# Altium PCB Copy of PCB1.PcbDoc
Units mm, origin at the board's own origin, x right, y up, seen from the top; angles counter-clockwise.
Board outline 84.33 x 68.58 mm, 2 copper layers (Top Layer, Bottom Layer); 30 components, 27 nets, 160 pads, 5 vias.
Unrouted connection lines stored in the file: 3.
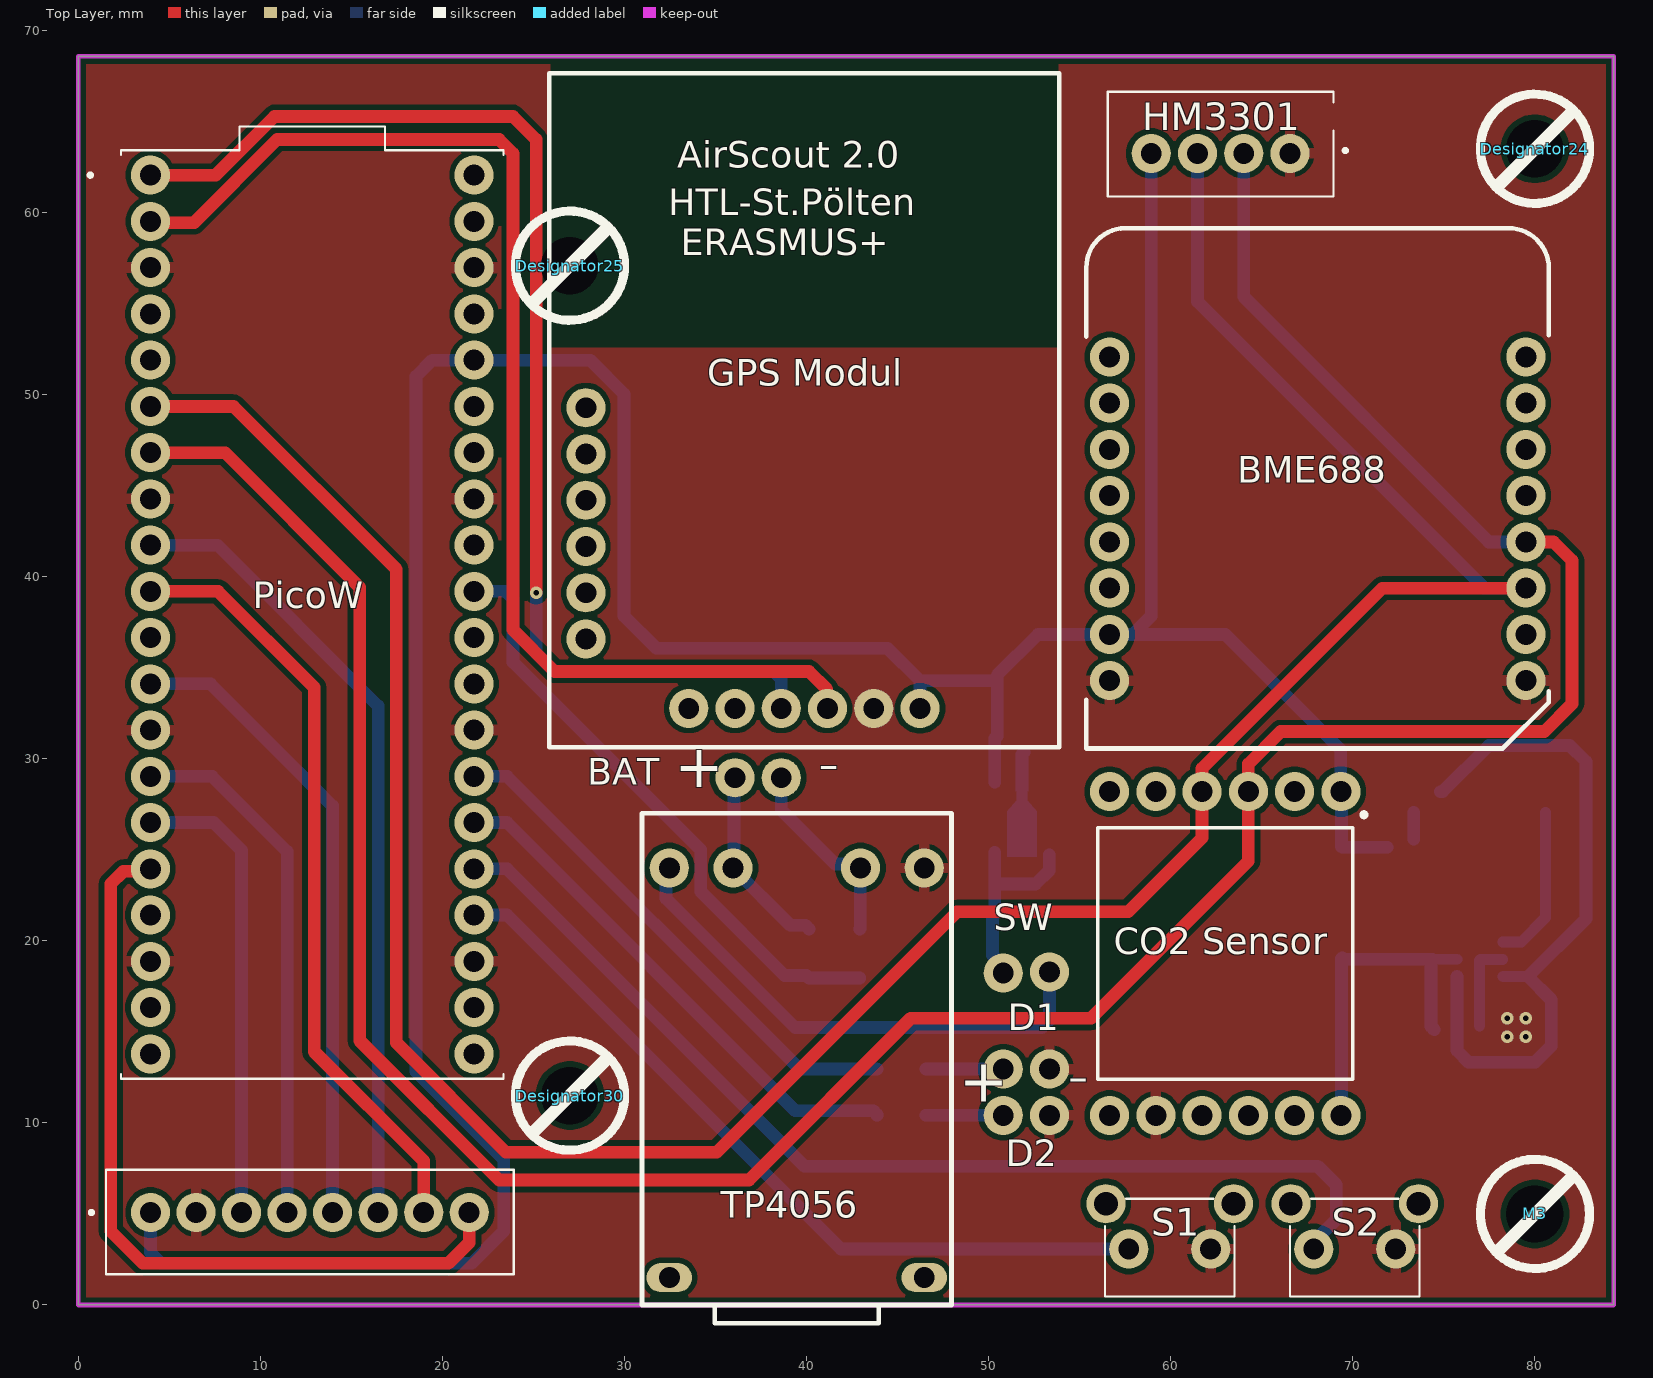
[diagram p0: Top Layer view]
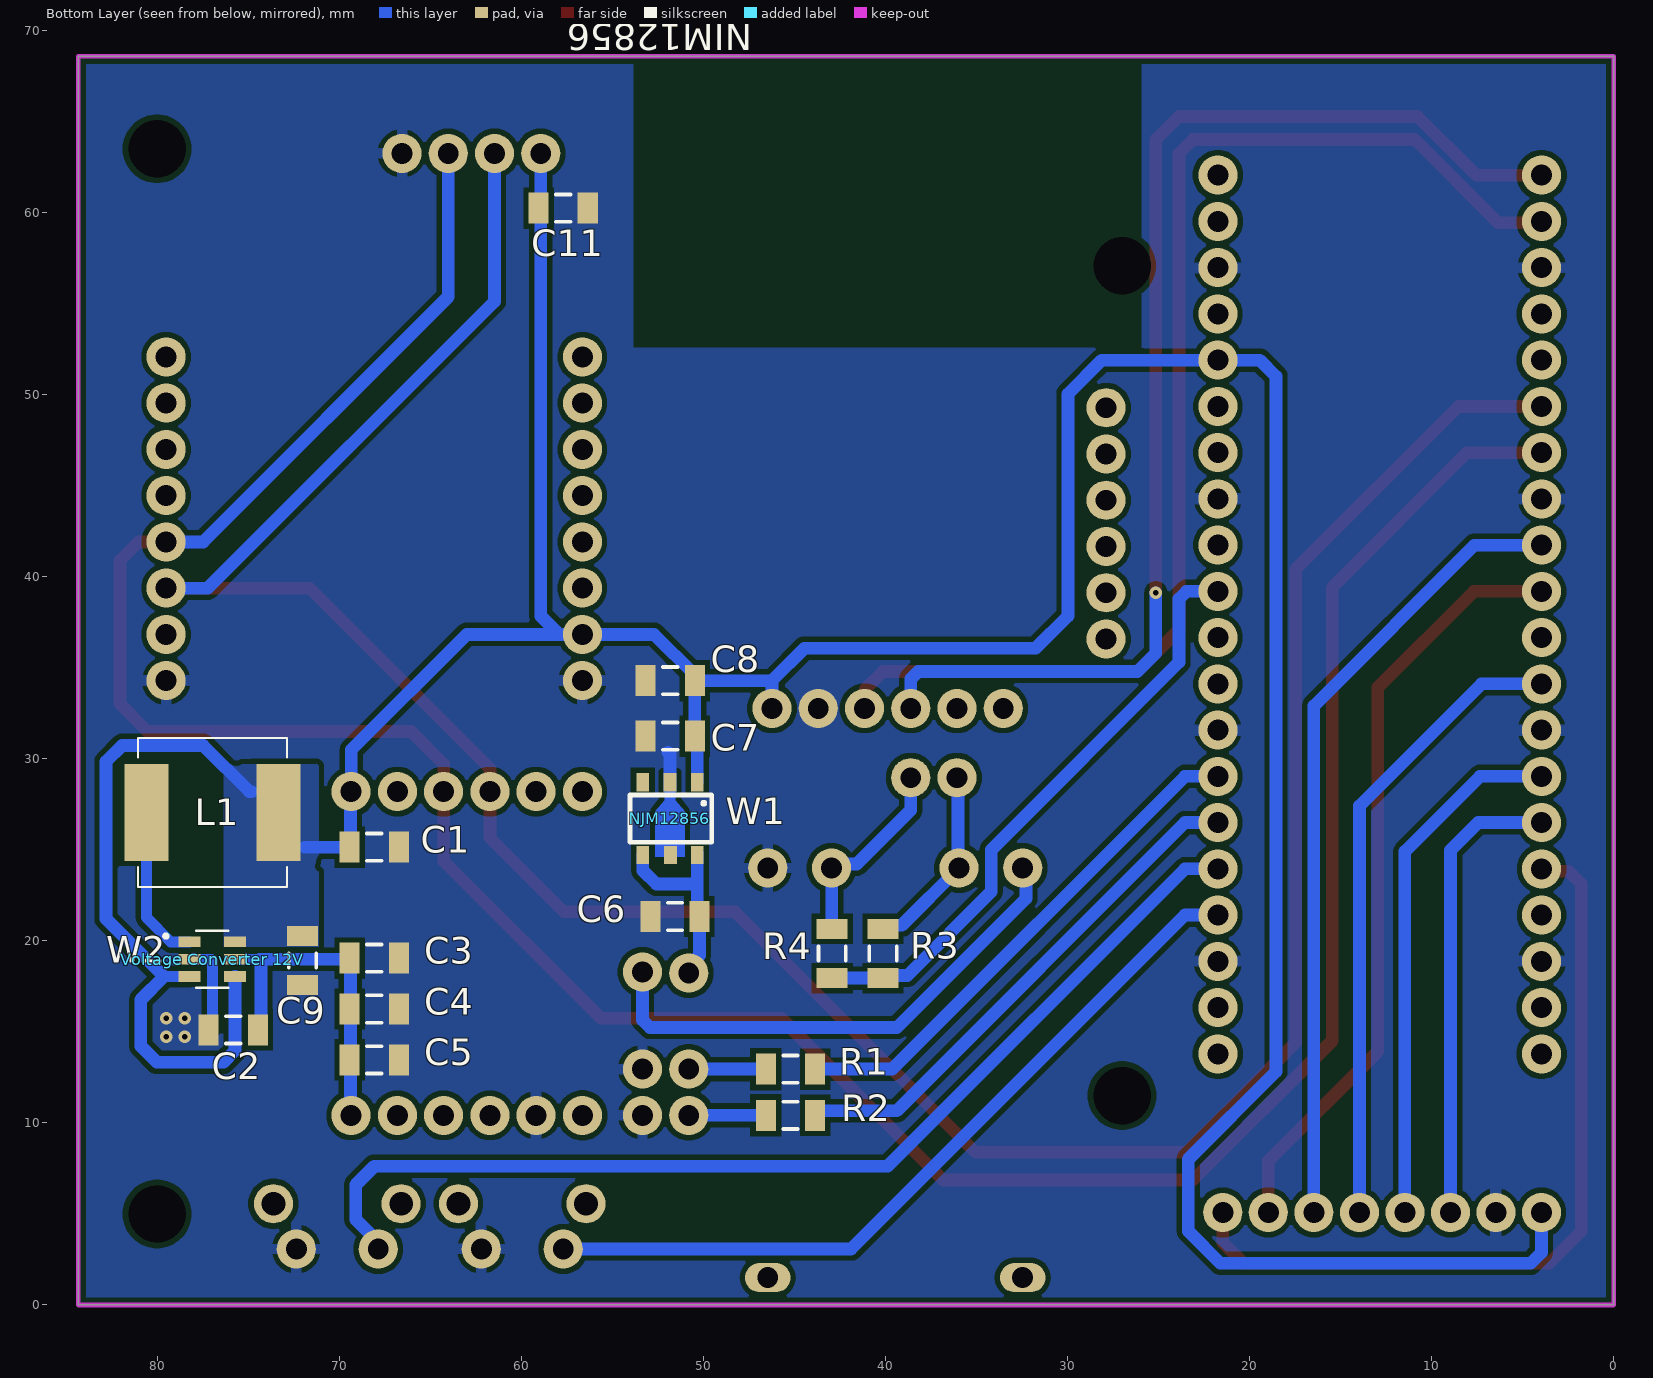
[diagram p1: Bottom Layer view, seen from below]

## Layer stack, top to bottom
Top Solder: solder mask 0.0102, Solder Resist, Dk 3.5
Top Layer: signal copper 0.0356
Dielectric 1: dielectric 0.32, FR-4, Dk 4.8
Bottom Layer: signal copper 0.0356
Bottom Solder: solder mask 0.0102, Solder Resist, Dk 3.5

## Board outline
0,0 0,10.14 0,68.58 84.328,68.58 84.328,0 5.31,0

## Design rules (kind name [scope] priority, off if disabled: settings)
Clearance [All] p1: gap=0.3 ignorepadtopadclearanceinfootprint=FALSE
HoleSize [All] p1: absolutevalues=TRUE maxlimit=3.5 minlimit=0.3 maxpercent=80.000 minpercent=20.000
HoleToHoleClearance [All] p1: gap=0.45 allowstackedmicrovias=TRUE
MinimumAnnularRing [All] p1: minimumring=0.2
PlaneConnect [All] p1: pad.planeconnectstyle=Relief pad.reliefexpansion=0.508 pad.reliefentries=4 pad.reliefconductorwidth=0.6 pad.reliefairgap=0.254 via.planeconnectstyle=Direct via.reliefexpansion=0.508 via.reliefentries=4 via.reliefconductorwidth=0.254 via.reliefairgap=0.254
PolygonConnect PolygonConnect_3 [All vs IsNamedPolygon('GND_L02_P002')] p1: thpad.connectstyle=Relief thpad.reliefconductorwidth=0.6 thpad.reliefentries=4 thpad.polygonreliefangle="90 Angle" thpad.airgapwidth=0.254 smdpad.connectstyle=Direct smdpad.reliefconductorwidth=0.254 smdpad.reliefentries=4 smdpad.polygonreliefangle="90 Angle" smdpad.airgapwidth=0.254 via.connectstyle=Direct via.reliefconductorwidth=0.254 via.reliefentries=4 via.polygonreliefangle="90 Angle" via.airgapwidth=0.254
PolygonConnect PolygonConnect_2 [All vs IsNamedPolygon('GND_L01_P001')] p2: thpad.connectstyle=Relief thpad.reliefconductorwidth=0.6 thpad.reliefentries=4 thpad.polygonreliefangle="90 Angle" thpad.airgapwidth=0.254 smdpad.connectstyle=Direct smdpad.reliefconductorwidth=0.254 smdpad.reliefentries=4 smdpad.polygonreliefangle="90 Angle" smdpad.airgapwidth=0.254 via.connectstyle=Direct via.reliefconductorwidth=0.254 via.reliefentries=4 via.polygonreliefangle="90 Angle" via.airgapwidth=0.254
PolygonConnect PolygonConnect_1 [All vs IsNamedPolygon('3V3_L02_P000')] p3: thpad.connectstyle=Relief thpad.reliefconductorwidth=0.254 thpad.reliefentries=4 thpad.polygonreliefangle="90 Angle" thpad.airgapwidth=0.254 smdpad.connectstyle=Direct smdpad.reliefconductorwidth=0.254 smdpad.reliefentries=4 smdpad.polygonreliefangle="90 Angle" smdpad.airgapwidth=0.254 via.connectstyle=Direct via.reliefconductorwidth=0.254 via.reliefentries=4 via.polygonreliefangle="90 Angle" via.airgapwidth=0.254
PolygonConnect [All vs IsNamedPolygon('3V3_L01_P000')] p4: thpad.connectstyle=Relief thpad.reliefconductorwidth=0.254 thpad.reliefentries=4 thpad.polygonreliefangle="90 Angle" thpad.airgapwidth=0.254 smdpad.connectstyle=Direct smdpad.reliefconductorwidth=0.254 smdpad.reliefentries=4 smdpad.polygonreliefangle="90 Angle" smdpad.airgapwidth=0.254 via.connectstyle=Direct via.reliefconductorwidth=0.254 via.reliefentries=4 via.polygonreliefangle="90 Angle" via.airgapwidth=0.254
PolygonConnect PolygonConnect_10 [All] p5: thpad.connectstyle=Relief thpad.reliefconductorwidth=0.6 thpad.reliefentries=4 thpad.polygonreliefangle="90 Angle" thpad.airgapwidth=0.254 smdpad.connectstyle=Direct smdpad.reliefconductorwidth=0.254 smdpad.reliefentries=4 smdpad.polygonreliefangle="90 Angle" smdpad.airgapwidth=0.254 via.connectstyle=Direct via.reliefconductorwidth=0.254 via.reliefentries=4 via.polygonreliefangle="90 Angle" via.airgapwidth=0.254
RoutingVias [All] p1: holewidth=0.3 width=0.4 viastyle="Through Hole" minholewidth=0.3 minwidth=0.4 maxholewidth=0.3 maxwidth=1
SolderMaskExpansion [All] p1: expansion=0.038 istentingtop=FALSE
Width [All] p1: maxlimit=0.7 minlimit=0.4 preferedwidth=0.7
27 further rules are at their usual default settings.

## Classes and differential pairs
component class Sheet1: BME688 C1 C2 C3 C4 C5 C6 C7 C8 C9 C11 "CO2 Sensor" "GPS Modul" L1 PicoW R1 R2 R3 R4 S1 S2 TLV61046ADBVR

## Components (designator, comment, footprint, x,y, rotation, side; value= is the part's Value field where it differs from the comment)
BME688 "" MIKROE-4893 56.642,34.29 r0 top
C1 "Cap" C1206 68.072,25.146 r0 bottom value=4.7uF
C2 "Cap" C1206 75.819,15.113 r180 bottom value=4.7uF
C3 "Cap" C1206 68.072,19.05 r0 bottom value=47uF
C4 "Cap" C1206 68.072,16.256 r0 bottom value=470pF
C5 "Cap" C1206 68.072,13.462 r0 bottom value=100nF
C6 "Cap" C1206 51.562,21.336 r180 bottom value=4.7uF
C7 "Cap" C1206 51.816,31.242 r180 bottom value=4.7uF
C8 "Cap" C1206 51.816,34.29 r180 bottom value=100nF
C9 "Cap" C1206 72.009,18.923 r90 bottom value=4.7uF
C11 "Cap" C1206 57.698,60.238 r0 bottom value=4.7uF
"CO2 Sensor" "PASCO2V01" IFX-SMD-LG-MLGA-14-1-V_MODUL 69.342,28.194 r270 top
Designator24 "Comment" Schraube-M3 80,63.5 r0 top
Designator25 "Comment" Schraube-M3 27,57.08 r0 top
Designator30 "Comment" Schraube-M3 27,11.5 r0 top
"GPS Modul" "CAM-M8Q Breakout" CAM-M8Q-Breakout 27.878,49.276 r270 top
HM3301 "Comment" JST_B4B-XH-AM_(LF)(SN) 62.738,63.754 r0 top
L1 "Inductor" IHLP3232DZER330M11 76.962,27.051 r0 bottom value=10uH
M3 "Comment" Schraube-M3 80,5 r0 top
NJM12856 "NJM12856" SOT89-5 51.816,26.416 r0 bottom (schematic designator "Spannungsregler 3V3")
PicoW "SC0915" MODULE_SC0915 12.85,37.922 r0 top
R1 "RES" C1206 45.212,12.954 r180 bottom value=220
R2 "RES" C1206 45.212,10.414 r180 bottom value=220
R3 "120k" C1206 40.132,19.304 r90 bottom
R4 "120k" C1206 42.926,19.304 r270 bottom
S1 "2-1825027-0" TE_2-1825027-0 59.944,4.318 r0 top (schematic designator SW1)
S2 "2-1825027-0" TE_2-1825027-0 70.104,4.318 r0 top (schematic designator SW2)
TP4056 "Name" "DEBO1 3.7LI 1.0A Entwicklerboards" 39.46,0 r0 top locked (schematic designator CHB-C-LIT1A)
"Voltage Converter 12V" "TLV61046ADBVR" SOT95P280X145-6N 76.977,18.989 r180 bottom
? "E-Ink" e-paper 3.97,5.08 r90 top

## Footprints (in the part's own frame and the unit in brackets; to place one, negate y for a bottom-side part, rotate by r counter-clockwise, add the part's x,y. Pads: shape width x height; smd on the part's side, far side on the other; paste and mask are expansions set on the pad)
C1206 [mm] "Chip Capacitor, Body 3.2x1.6mm, IPC High Density"
  rect 1.1x1.7 smd: 1(-1.35,0) 2(1.35,0)
  silkscreen extent -0.4,-0.75 0.4,0.75, body extent -1.7,-0.9 1.7,0.9, height 1.3
CAM-M8Q-Breakout [mm] "https://github.com/watterott/CAM-M8Q-Breakout/blob/master/hardware/CAM-M8Q-Breakout_v12.pdf"
  round 2.15 hole 1.15: 1(0,0) 2(2.54,0) 3(5.08,0) 3(16.51,15.81) 4(7.62,0) 5(10.16,0) 6(12.7,0) 7(16.51,5.65) 8(16.51,8.19) 9(16.51,10.73) 10(16.51,13.27) 12(16.51,18.35)
  silkscreen extent -18.37,-2 18.63,26
"DEBO1 3.7LI 1.0A Entwicklerboards" [mm]
  round 2.15 hole 1.15: 1(-7,24) 2(-3.5,24) 3(3.5,24) 4(7,24)
  oval 2.5x1.6 hole 1.15: 5(-7,1.5) 6(7,1.5)
  silkscreen extent -8.5,-1 8.5,27
e-paper [mm]
  round 2.15 hole 1.15: 1(0,0) 2(0,-2.5) 3(0,-5) 4(0,-7.5) 5(0,-10) 6(0,-12.5) 7(0,-15) 8(0,-17.5)
  silkscreen extent -3.4,-19.95 2.35,3.35, body extent -3.4,-19.95 2.35,2.45, height 7
IFX-SMD-LG-MLGA-14-1-V_MODUL [mm] "Module, 2.54 mm Pitch, 14 Pin, 14.00 mm W X 13.80 mm L X 7.68 mm H Body"
  round 2.15 hole 1.15: 3.3(0,0) 12V(17.78,0) GND(17.78,-10.16) INT(17.78,-7.62) PSEL(17.78,-5.08) PWM(17.78,-2.54) PWM_DIS(0,-10.16) RX(0,-2.54) SCL(0,-5.08) SWCLK(17.78,-12.7) SWD(0,-12.7) TX_SDA(0,-7.62)
  silkscreen extent 1.15,-13.35 15.79,1.4, body extent 1.99,-13.35 15.79,0.65, height 18.88
IHLP3232DZER330M11 [mil]
  rect 95x210 smd: 1(-142.48,0) 2(142.48,0)
  silkscreen extent -161,-161 161,161
JST_B4B-XH-AM_(LF)(SN) [mm]
  round 2.15 hole 1.15: 1(3.81,-0.508) 2(1.27,-0.508) 3(-1.27,-0.508) 4(-3.81,-0.508)
  silkscreen extent -6.2,-2.88 6.95,2.88
MIKROE-4893 [mm] "https://www.mikroe.com/environment-3-click#/298-input_voltage-3_3v"
  round 2.15 hole 1.15: 1(0,17.78) 2(0,15.24) 3(0,12.7) 4(0,10.16) 5(0,7.62) 6(0,5.08) 7(0,2.54) 8(0,0) 9(22.86,0) 10(22.86,2.54) 11(22.86,5.08) 12(22.86,7.62) 13(22.86,10.16) 14(22.86,12.7) 15(22.86,15.24) 16(22.86,17.78)
  silkscreen extent -1.28,-3.72 24.13,24.85, body extent -1.4,-3.81 24.38,24.77, height 13.28
MODULE_SC0915 [mm]
  round 2.15 hole 1.15: 1(-8.89,24.13) 2(-8.89,21.59) 3(-8.89,19.05) 4(-8.89,16.51) 5(-8.89,13.97) 6(-8.89,11.43) 7(-8.89,8.89) 8(-8.89,6.35) 9(-8.89,3.81) 10(-8.89,1.27) 11(-8.89,-1.27) 12(-8.89,-3.81) 13(-8.89,-6.35) 14(-8.89,-8.89) 15(-8.89,-11.43) 16(-8.89,-13.97) 17(-8.89,-16.51) 18(-8.89,-19.05) 19(-8.89,-21.59) 20(-8.89,-24.13) 21(8.89,-24.13) 22(8.89,-21.59) 23(8.89,-19.05) 24(8.89,-16.51) 25(8.89,-13.97) 26(8.89,-11.43) 27(8.89,-8.89) 28(8.89,-6.35) 29(8.89,-3.81) 30(8.89,-1.27) 31(8.89,1.27) 32(8.89,3.81) 33(8.89,6.35) 34(8.89,8.89) 35(8.89,11.43) 36(8.89,13.97) 37(8.89,16.51) 38(8.89,19.05) 39(8.89,21.59) 40(8.89,24.13)
  silkscreen extent -12.29,-25.5 10.5,26.8, body extent -10.39,-25.51 10.61,26.79, height 10.47
Schraube-M3 [mm] "Befestigungsschraube für Prints"
  round 0.75 hole 3.15 unplated: 1(0,0)
  silkscreen extent -3,-3 3,3
SOT89-5 [mm]
  rect 0.701x1 smd: 1(-1.486,-2.294) 2(-0.012,1.706) 2(0.014,-2.294) 3(1.513,-2.294) 4(1.515,1.706) 5(-1.486,1.706)
  Top Layer region: -0.786,-0.693 -0.786,1.807 0.814,1.807 0.814,-0.693 0.314,-1.293 0.314,-2.593 0.014,-2.593 -0.286,-2.593 -0.286,-1.293
  Top Layer region: -0.336,-1.794 0.365,-1.794 0.365,-2.794 -0.336,-2.794
  silkscreen extent -2.29,-1.59 2.21,1.01
SOT95P280X145-6N [mm]
  rect 1.21x0.58 smd: 1(-1.255,0.95) 2(-1.255,0) 3(-1.255,-0.95) 4(1.255,-0.95) 5(1.255,0) 6(1.255,0.95)
  silkscreen extent -2.64,-1.56 0.88,1.56
TE_2-1825027-0 [mm]
  round 2.15 hole 1.15: 1(-2.25,-1.245) 2(2.25,-1.245)
  round 2.15 hole 1.3: S1(-3.505,1.245) S2(3.505,1.245)
  silkscreen extent -3.55,-3.86 3.55,1.52

## Part data
BME688: library part "MIKROE-4893 - 3V3"
C1 C2 C3 C4 C5 C6 C7 C8 C9 C11: "Capacitor", LatestRevisionDate=17-Jul-2002, LatestRevisionNote="Re-released for DXP Platform.", PackageDescription="Radial Cap, Thru-Hole; 2 Leads; 0.3 in Pin Spacing", PackageReference=RAD-0.3, Published=8-Jun-2000, Publisher="Altium Limited"
"CO2 Sensor": "XENSIV PAS CO2", Manufacturer="Infineon Technologies", Manufacturer Order Number=PASCO2V01, PackageReference=LG-MLGA-14-1
"GPS Modul": library part DT15-12PA, "DT Series 12 Position Dual Row 4.44 mm Panel Mount Receptacle", Package=None, Availability=Unavailable, MF="TE Connectivity", MP=DT15-12PA, Price=None, SnapEDA_Link=https://www.snapeda.com/parts/DT15-12PA/TE%20Connectivity%20Deutsch%20Connectors/view-part/2279777/?ref=snap
NJM12856: library part TLV61046ADBVR, "Boost Switching Regulator IC Positive Adjustable 3.3V 1 Output SOT-23-6", Package="SOT-23 Texas Instruments", Digi-Key_Part_Number=296-47674-1-ND, Digi-Key_Purchase_URL=https://www.digikey.com/product-detail/en/texas-instruments/TLV61046ADBVR/296-47674-1-ND/8133043?utm_source=snapeda&utm_medium=aggregator&utm_campaign=symbol, MF="Texas Instruments", MP=TLV61046ADBVR, SnapEDA_Link=https://www.snapeda.com/parts/TLV61046ADBVR/Texas%20Instruments/view-part/985721/?ref=snap
PicoW: "RP2040 Raspberry Pi Pico series ARMÂ® CortexÂ®-M0+ MCU 32-Bit Embedded Evaluation Board", Package=None, Availability="In Stock", Check_prices=https://www.snapeda.com/parts/SC0915/Raspberry+Pi/view-part/?ref=eda, MF="Raspberry Pi", MP=SC0915, Price=None, Purchase-URL=https://pricing.snapeda.com/search/part/SC0915/?ref=eda, SnapEDA_Link=https://www.snapeda.com/parts/SC0915/Raspberry+Pi/view-part/?ref=snap
R1 R2: "Widerstand"
R3 R4: library part RES, "Widerstand"
S1 S2: "Switch Tactile OFF _ON_ SPST Round Button PC Pins 0.05A 24VDC 1.57N Thru-Hole Loose Piece", Package=None, Availability=Unavailable, EU_RoHS_Compliance=Compliant, MF="TE Connectivity", MP=2-1825027-0, Price=None, SnapEDA_Link=https://www.snapeda.com/parts/2-1825027-0/TE%20Connectivity%20ALCOSWITCH%20Switches/view-part/236241/?ref=snap, TE_purchase_URL=https://www.te.com/usa-en/product-2-1825027-0.html?te_bu=Cor&te_type=disp&te_campaign=seda_glo_cor-seda-global-disp-prtnr-fy19-seda-model-bom-cta_sma-317_1&elqCampaignId=32493
"Voltage Converter 12V": "Boost Switching Regulator IC Positive Adjustable 3.3V 1 Output SOT-23-6", Package="SOT-23 Texas Instruments", Digi-Key_Part_Number=296-47674-1-ND, Digi-Key_Purchase_URL=https://www.digikey.com/product-detail/en/texas-instruments/TLV61046ADBVR/296-47674-1-ND/8133043?utm_source=snapeda&utm_medium=aggregator&utm_campaign=symbol, MF="Texas Instruments", MP=TLV61046ADBVR, SnapEDA_Link=https://www.snapeda.com/parts/TLV61046ADBVR/Texas%20Instruments/view-part/985721/?ref=snap
?: library part B8B-XH-A(LF)(SN), "Connector Header Through Hole 8 position 0.098 (2.50mm)", Package=None, Check_prices=https://www.snapeda.com/parts/B8B-XH-A(LF)(SN)/JST+Sales+America+Inc./view-part/?ref=eda, MF="JST Sales America Inc.", MP=B8B-XH-A(LF)(SN), SnapEDA_Link=https://www.snapeda.com/parts/B8B-XH-A(LF)(SN)/JST+Sales+America+Inc./view-part/?ref=snap
L1: Code_IEC=1005, Code_JEITA=0402, LatestRevisionDate=29-May-2009, LatestRevisionNote="IPC-7351 Footprint Added.", PackageDescription="Chip Inductor", PackageReference=0402-A, Published=8-Jun-2000, Publisher="Altium Limited"

## Free pads (board coordinates)
  round 2.15 hole 1.15: 14(38.608,28.956) 15(36.068,28.956) 18(53.34,18.288) 19(50.8,18.23) 21(50.8,12.954) 22(53.34,10.414) 23(50.8,10.414) 24(53.34,12.954)

## Via types
v1: diameter 0.7, hole 0.3, Top Layer to Bottom Layer, 5 vias

## Nets (pads, with @x,y where several pads share a name; then routed paths per layer and width w, separated by ;. In a path a pad name is that pad's centre, name@x,y a point inside that pad or via, vN(x,y) a via of type N, cw(c..) or ccw(c..) an arc to the next point about the centre after c; other vN are vias at no path point)
3V3: "CO2 Sensor.3.3" "GPS Modul.12" "Voltage Converter 12V.3" "Voltage Converter 12V.4" "Voltage Converter 12V.6" ?.1 BME688.7 C1.2 C7.2 C8.2 C9.2 C11.2 HM3301.4 L1.1 NJM12856.1 PicoW.34 PicoW.36 | length 222.8
  Bottom Layer w0.6: 78.237,18.034 79.629,18.034
  Bottom Layer w0.7: ?.1@4.185,4.865 ?.1 3.97,2.888 4.572,2.286 21.59,2.286 23.368,4.064 23.368,8.004 18.548,12.824 18.548,51 19.44,51.892 PicoW.36 28.118,51.892 29.972,50.038 29.972,37.846 31.75,36.068 44.45,36.068 46.228,34.29 ; 46.187,32.807 46.228,32.766 46.228,34.29 ; NJM12856.1 50.33,31.106 C7.2 C8.2 ; HM3301.4 58.928,37.846 57.912,36.83 ; 71.882,25.146 C1.2 69.382,25.186 69.382,28.154 69.342,28.194 69.342,30.48 62.992,36.83 57.912,36.83 ; L1.1@73.343,25.59 L1.1 ; 74.803,28.194 74.93,28.194 77.47,30.734 81.915,30.734 82.804,29.845 82.804,21.209 79.629,18.034 80.899,16.764 80.899,14.224 80.01,13.335 76.357,13.335 75.722,13.97 75.722,18.039 ; 46.228,34.29 C8.2 ; C8.2 50.466,34.59 52.706,36.83 BME688.7 57.912,36.83
12V: "CO2 Sensor.12V" "Voltage Converter 12V.5" C2.2 C3.2 C4.2 C5.2 | length 18.9
  Bottom Layer w0.6: 74.356,18.989 75.722,18.989
  Bottom Layer w0.7: 69.342,10.414 69.382,10.454 69.382,19.01 C3.2 69.483,18.989 74.356,18.989 ; 69.85,10.414 69.89,10.454 ; 74.29,18.923 74.29,15.292 C2.2
"ADC Input": PicoW.31 R3.1 R4.2 | length 33.4
  Bottom Layer w0.7: PicoW.31 23.466,39.192 23.876,38.782 23.876,35.306 34.185,24.997 34.185,22.711 38.795,18.101 39.985,18.101 R3.1 R4.2
"Batterie Out": C6.2 NJM12856.4 NJM12856.5 pad.19 | length 11.4
  Bottom Layer w0.7: NJM12856.5 50.33,23.114 ; NJM12856.5 NJM12856.5@50.33,24.859 ; pad.19@50.8,17.918 pad.19 50.8,18.623 50.212,19.211 C6.2 50.33,21.454 50.33,23.114 ; NJM12856.4 53.33,23.866 52.578,23.114 50.33,23.114
GND: "CO2 Sensor.GND" "GPS Modul.3"@43.688,32.766 "Voltage Converter 12V.2" ?.2 BME688.8 BME688.9 C1.1 C2.1 C3.1 C4.1 C5.1 C6.1 C7.1 C8.1 C9.1 C11.1 HM3301.1 NJM12856.2 pad.22 pad.24 PicoW.3 PicoW.8 PicoW.13 PicoW.18 PicoW.23 PicoW.28 PicoW.33 PicoW.38 S1.2 S2.2 TP4056.4 | length 6.7
  Top Layer w0.7: PicoW.23 PicoW.23@21.816,18.796
  Bottom Layer w0.6: C2.1@76.962,15.32 76.962,18.923 77.018,18.979 78.222,18.979 78.232,18.989
  Bottom Layer w0.7: NJM12856.2@51.83,28.71 51.83,30.24 51.943,30.353
  other v1: 78.486,14.732 79.502,14.732 78.486,15.748 79.502,15.748
Net_3: ?.3 PicoW.15 | length 25.5
  Bottom Layer w0.7: PicoW.15 7.441,26.492 8.96,24.973 8.96,5.09 ?.3
Net_4: ?.4 PicoW.14 | length 29.1
  Bottom Layer w0.7: PicoW.14 7.34,29.032 11.47,24.902 ?.4 ?.4@11.46,5.09
Net_5: ?.5 PicoW.12 | length 35.1
  Bottom Layer w0.7: PicoW.12 7.26,34.112 13.96,27.412 13.96,5.09 ?.5
Net_6: ?.6 PicoW.9 | length 44
  Bottom Layer w0.7: PicoW.9 7.64,41.732 16.47,32.902 ?.6 ?.6@16.46,5.09
Net_7: ?.7 PicoW.10 | length 42.5
  Top Layer w0.7: PicoW.10 7.68,39.192 12.96,33.912 12.96,13.912 18.97,7.902 ?.7 ?.7@18.96,5.09
Net_8: ?.8 PicoW.16 | length 44
  Top Layer w0.7: PicoW.16@3.893,23.885 3.829,23.821 2.485,23.821 1.778,23.114 1.778,4.064 3.556,2.286 20.32,2.286 21.47,3.436 ?.8
NetCHB-C-LIT1A_1: pad.18 TP4056.1 | length 28.5
  Bottom Layer w0.7: TP4056.1 32.279,23.819 32.279,22.331 39.37,15.24 52.93,15.24 53.34,15.65 pad.18
NetCHB-C-LIT1A_2: pad.15 R3.2 TP4056.2 | length 10.6
  Bottom Layer w0.7: pad.15 36.014,28.902 36.014,24.054 TP4056.2 39.106,20.854 39.932,20.854 R3.2
NetCHB-C-LIT1A_3: pad.14 R4.1 TP4056.3 | length 10.8
  Bottom Layer w0.7: pad.14 38.608,27.178 41.57,24.216 42.744,24.216 TP4056.3 42.943,23.983 42.943,20.671 R4.1
NetD1_1: pad.21 R1.1 | length 4.2
  Bottom Layer w0.7: R1.1 pad.21
NetD2_1: pad.23 R2.1 | length 4.2
  Bottom Layer w0.7: R2.1 pad.23
NetL1_2: "Voltage Converter 12V.1" L1.2 | length 8.7
  Bottom Layer w0.6: 78.232,19.939 79.248,19.939 80.581,21.272 L1.2
NetPicoW_24: PicoW.24 S1.1 | length 43.6
  Bottom Layer w0.7: PicoW.24 23.546,21.412 41.885,3.073 S1.1
NetPicoW_25: PicoW.25 S2.1 | length 58.6
  Bottom Layer w0.7: PicoW.25 23.546,23.952 39.878,7.62 68.072,7.62 69.088,6.604 69.088,4.699 67.854,3.465 S2.1
NetPicoW_26: PicoW.26 R2.2 | length 28.8
  Bottom Layer w0.7: PicoW.26 23.546,26.492 39.37,10.668 43.662,10.668 43.862,10.468 R2.2
NetPicoW_27: PicoW.27 R1.2 | length 28.8
  Bottom Layer w0.7: PicoW.27 23.546,29.032 39.624,12.954 R1.2
NetSW1_S1: S1.S1 S1.S2
NetSW2_S1: S2.S1 S2.S2
RX: "GPS Modul.10" PicoW.2 | length 68.4
  Top Layer w0.7: PicoW.2 4.036,59.436 6.35,59.436 10.922,64.008 23.114,64.008 23.876,63.246 23.876,37.084 26.162,34.798 40.132,34.798 41.107,33.823 41.107,32.807 41.148,32.766 41.148,33.158
SCL: "CO2 Sensor.SCL" BME688.12 HM3301.2 PicoW.7 | length 163
  Top Layer w0.7: PicoW.7 8.06,46.812 15.46,39.412 15.46,14.512 23.114,6.858 36.83,6.858 45.72,15.748 55.626,15.748 64.262,24.384 64.262,28.194 64.262,29.718 66.04,31.496 80.518,31.496 82.042,33.02 82.042,40.894 81.026,41.91 BME688.12
  Bottom Layer w0.7: HM3301.2 64.008,55.372 77.47,41.91 BME688.12
SDA: "CO2 Sensor.TX_SDA" BME688.11 HM3301.3 PicoW.6 | length 155.5
  Top Layer w0.7: PicoW.6 8.52,49.352 17.46,40.412 17.46,14.412 23.49,8.382 35.052,8.382 48.26,21.59 57.658,21.59 61.722,25.654 61.722,28.194 61.722,29.464 71.628,39.37 BME688.11
  Bottom Layer w0.7: HM3301.3 61.468,55.118 77.216,39.37 BME688.11
TX: "GPS Modul.9" PicoW.1 | length 67.3
  Top Layer w0.7: PicoW.1 7.552,62.052 10.778,65.278 23.876,65.278 25.146,64.008 v1(25.146,39.116)
  Bottom Layer w0.7: v1(25.146,39.116) 25.146,35.814 26.162,34.798 38.198,34.798 38.608,34.388 38.608,32.766 38.331,33.043
pads on no net: "CO2 Sensor.INT" "CO2 Sensor.PSEL" "CO2 Sensor.PWM" "CO2 Sensor.PWM_DIS" "CO2 Sensor.RX" "CO2 Sensor.SWCLK" "CO2 Sensor.SWD" "GPS Modul.1" "GPS Modul.2" "GPS Modul.3"@27.878,44.196 "GPS Modul.4" "GPS Modul.5" "GPS Modul.6" "GPS Modul.7" "GPS Modul.8" BME688.1 BME688.2 BME688.3 BME688.4 BME688.5 BME688.6 BME688.10 BME688.13 BME688.14 BME688.15 BME688.16 Designator24.1 Designator25.1 Designator30.1 M3.1 NJM12856.3 PicoW.4 PicoW.5 PicoW.11 PicoW.17 PicoW.19 PicoW.20 PicoW.21 PicoW.22 PicoW.29 PicoW.30 PicoW.32 PicoW.35 PicoW.37 PicoW.39 PicoW.40 TP4056.5 TP4056.6

## Polygon pours and split planes (outlines as drawn)
GND on Bottom Layer "GND_L02_P002" (solid, remove dead copper, pour order 2): 0,68.58 0,0 84.328,0 84.328,68.58 53.848,68.58 53.848,52.578 25.908,52.578 25.908,68.58
3V3 on Bottom Layer "3V3_L02_P000" (solid, pour order 0): 76.327,19.685 71.12,19.685 71.12,29.718 72.156,29.698 76.327,29.698
GND on Top Layer "GND_L01_P001" (solid, remove dead copper, pour order 1): 0,68.58 0,0 84.328,0 84.328,68.58 53.848,68.58 53.848,52.578 25.908,52.578 25.908,68.58

## Keep-outs
Keep-Out Layer:
  lines w0.254: 0,0 5.31,0 84.328,0 84.328,68.58 0,68.58 0,0

## Silkscreen, mask and mechanical layers (free items; w line width, h text height)
Top Overlay:
  text "AirScout 2.0" at 32.898,61.96 h2.5
  text "HTL-St.Pölten" at 32.398,59.36 h2.5
  text "ERASMUS+" at 33.098,57.16 h2.5
  text "BAT" at 27.94,28.067 h2.5
  text "-" at 40.64,27.932 h4
  text "+" at 32.766,27.652 h4
  text "SW" at 50.292,20.094 h2.5
  text "D1" at 51.054,14.605 h2.5
  text "-" at 54.356,10.787 h4
  text "+" at 48.387,10.38 h4
  text "D2" at 50.927,7.112 h2.5
Bottom Overlay:
  text "W1" at 48.768,25.908 h2.5
  text "W2" at 82.804,18.288 h2.5

## Dimensions
61.976,-11.176 to 68.072,-11.176 on Bottom Layer
43.942,-3.302 to 57.912,-3.302 on Bottom Layer
0.001,-10.16 to 35.053,-11.43 on Bottom Layer